# Altium PCB ECUEXT1_23.PcbDoc
Units mm, origin at the board's own origin, x right, y up, seen from the top; angles counter-clockwise.
Board outline 67.04 x 44.51 mm, 2 copper layers (Top Layer, Bottom Layer); 21 components, 27 nets, 127 pads, 6 vias.
Unrouted connection lines stored in the file: 1.
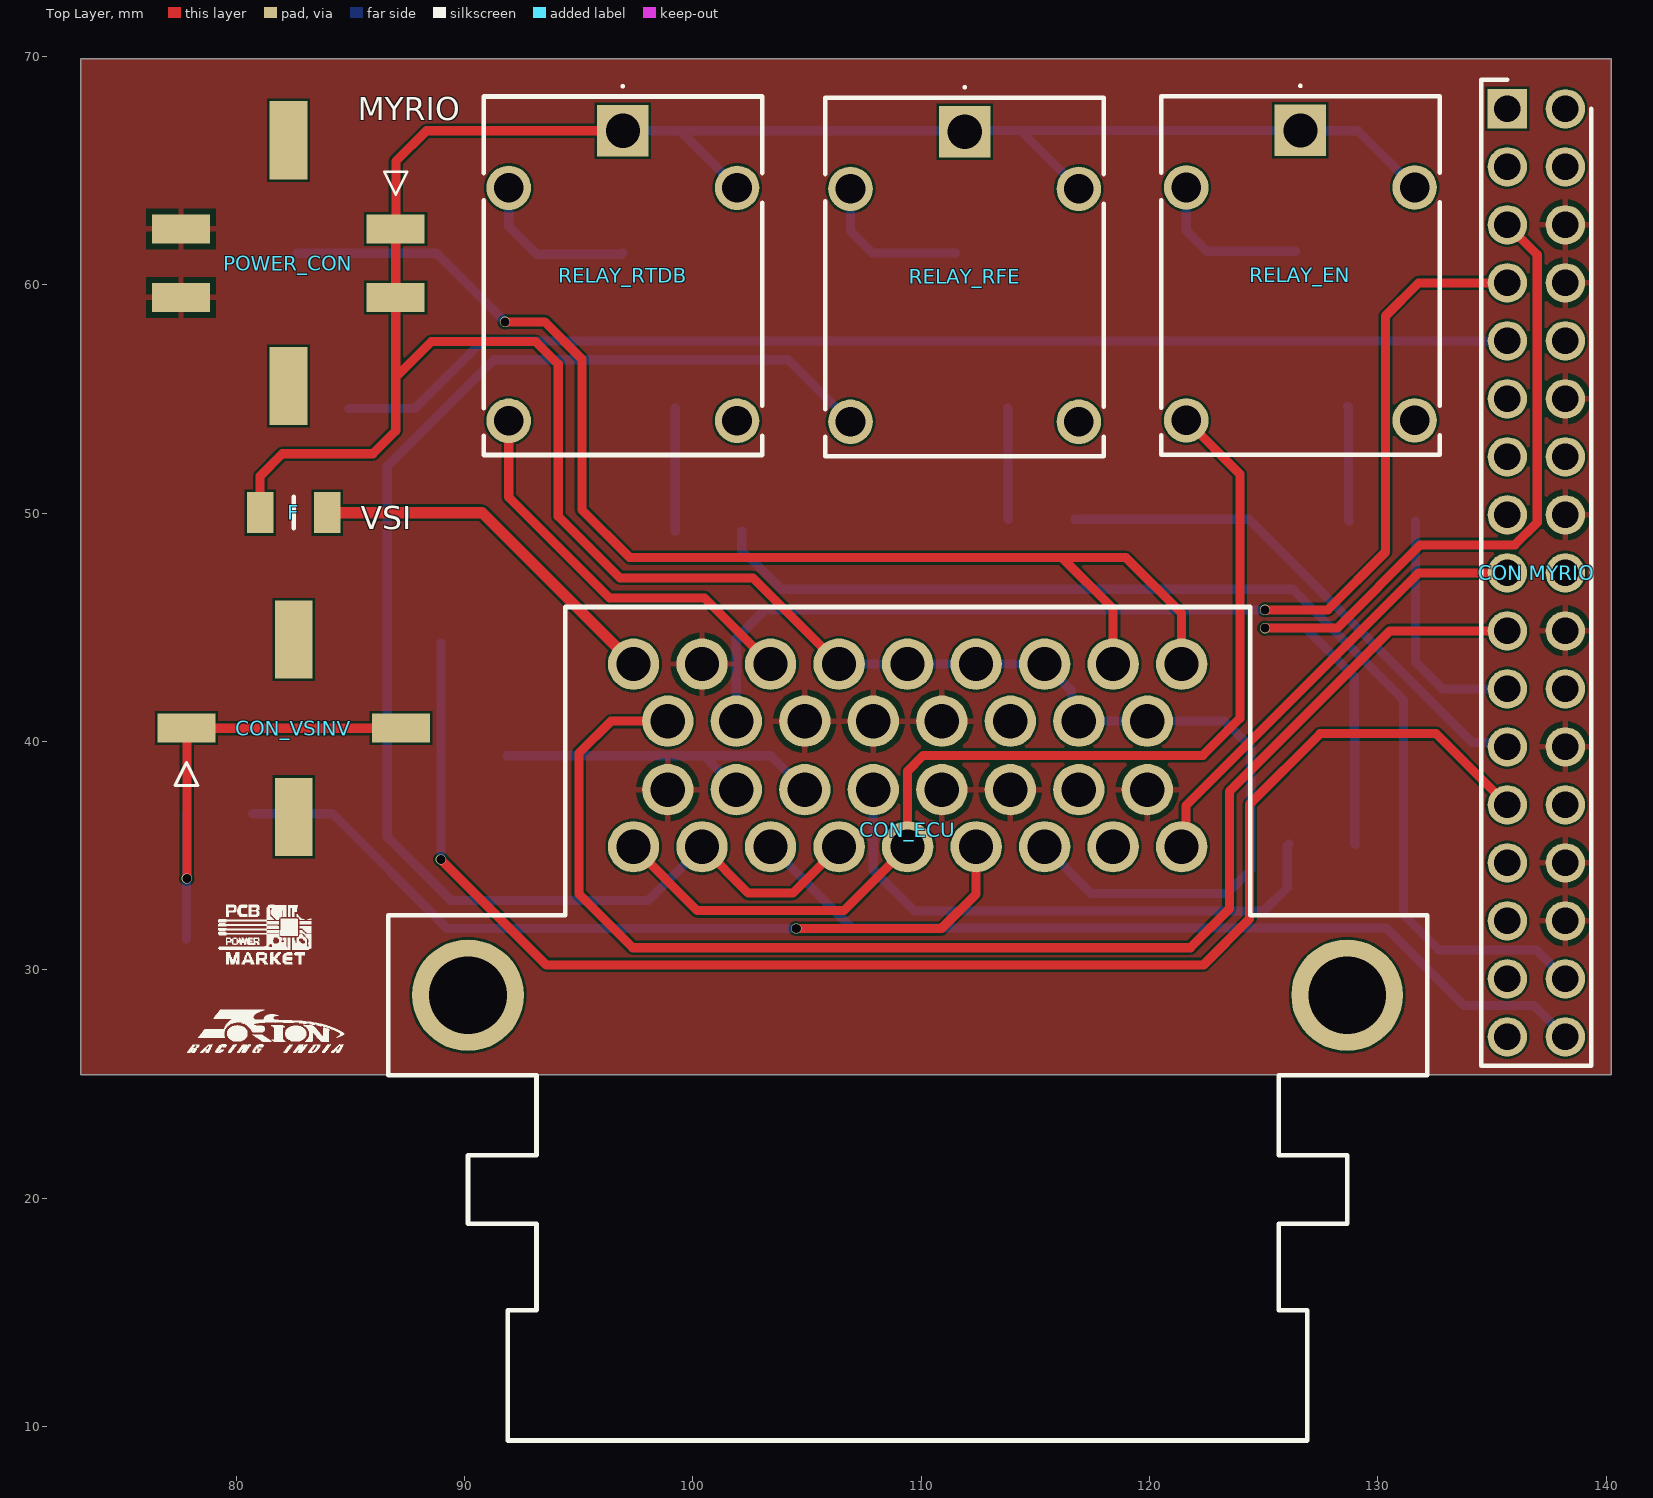
[diagram p0: Top Layer view]
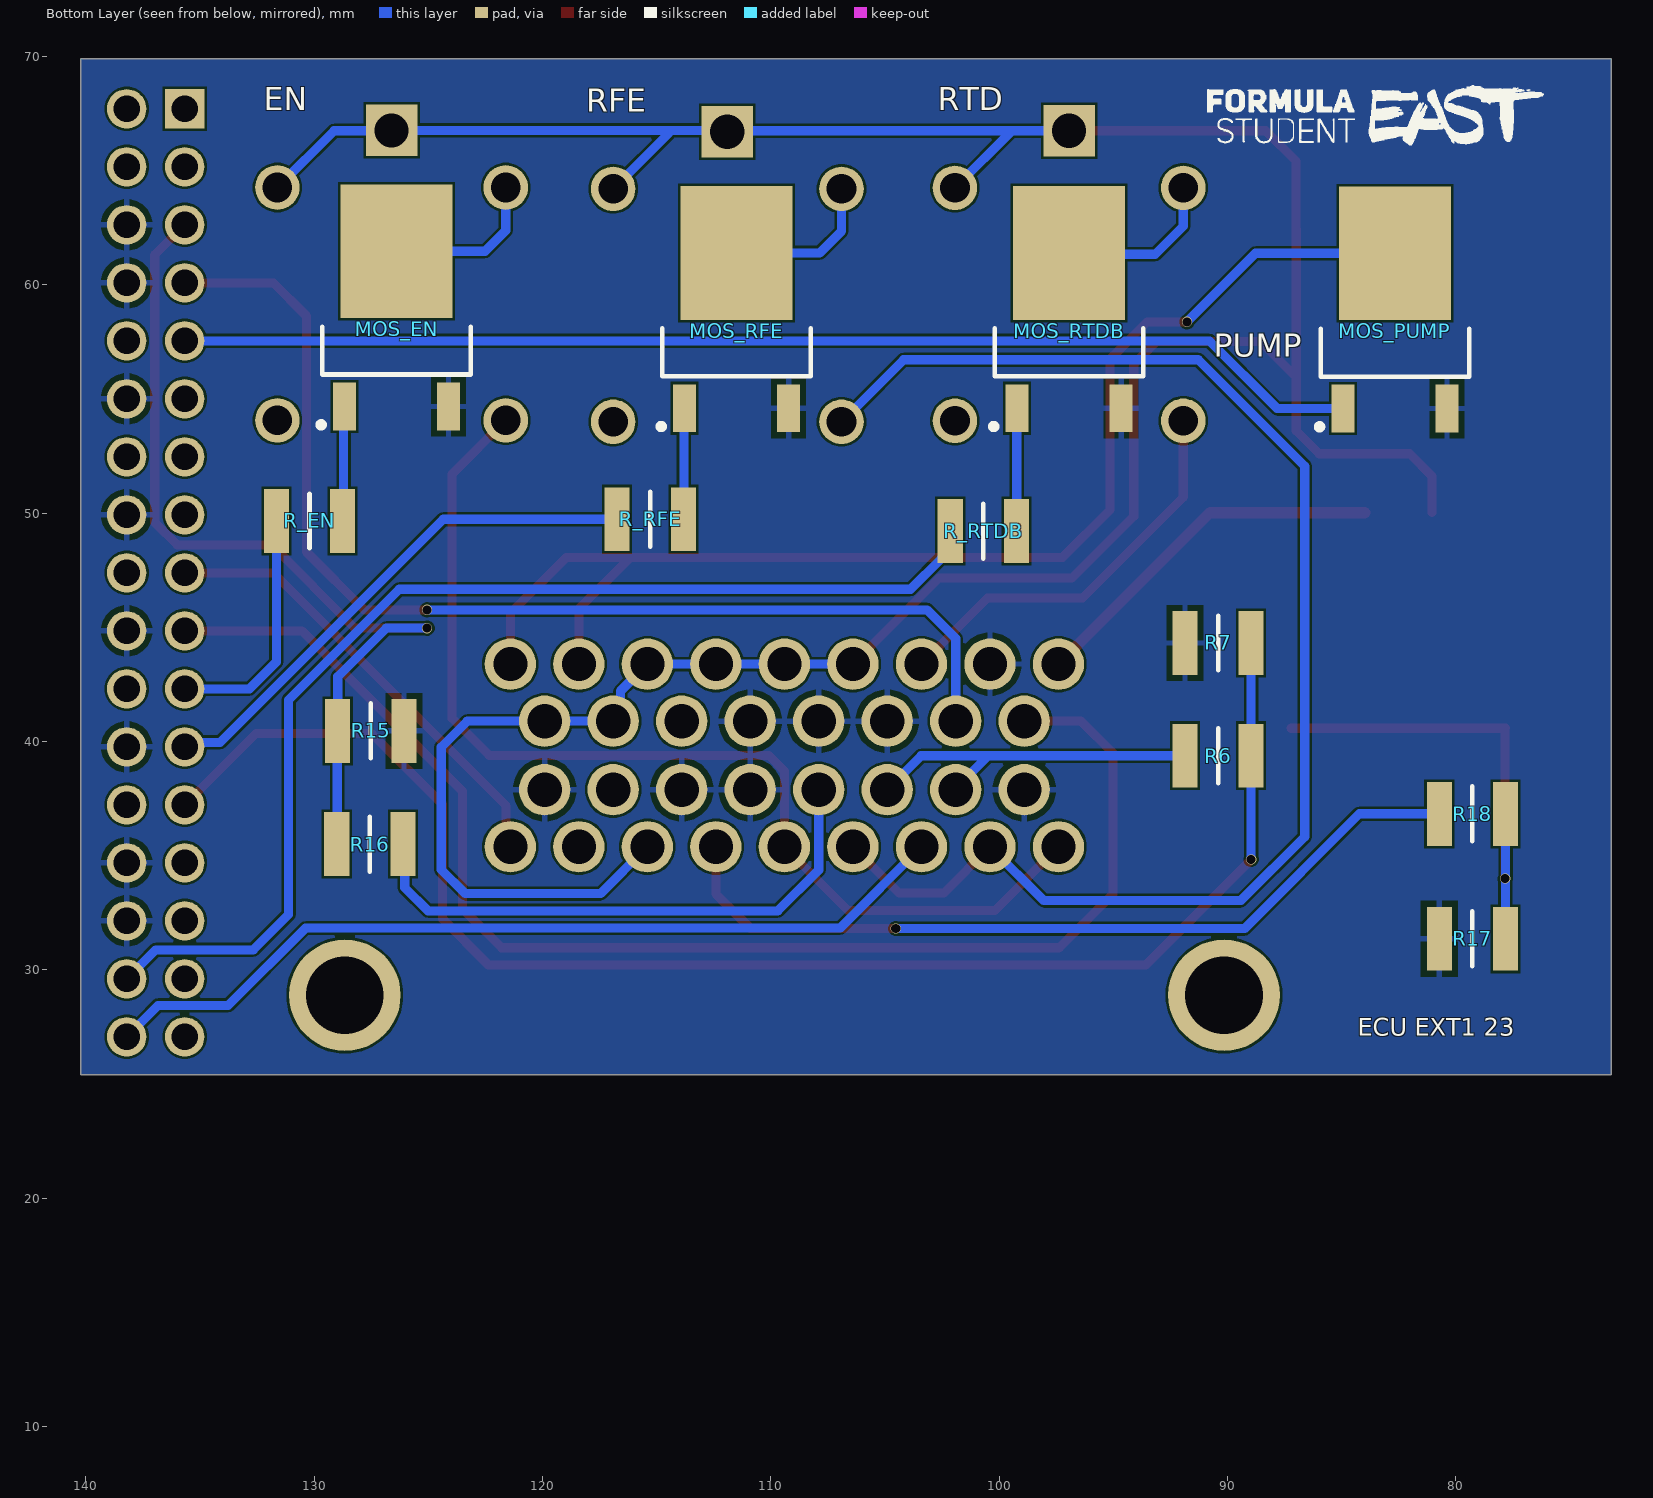
[diagram p1: Bottom Layer view, seen from below]
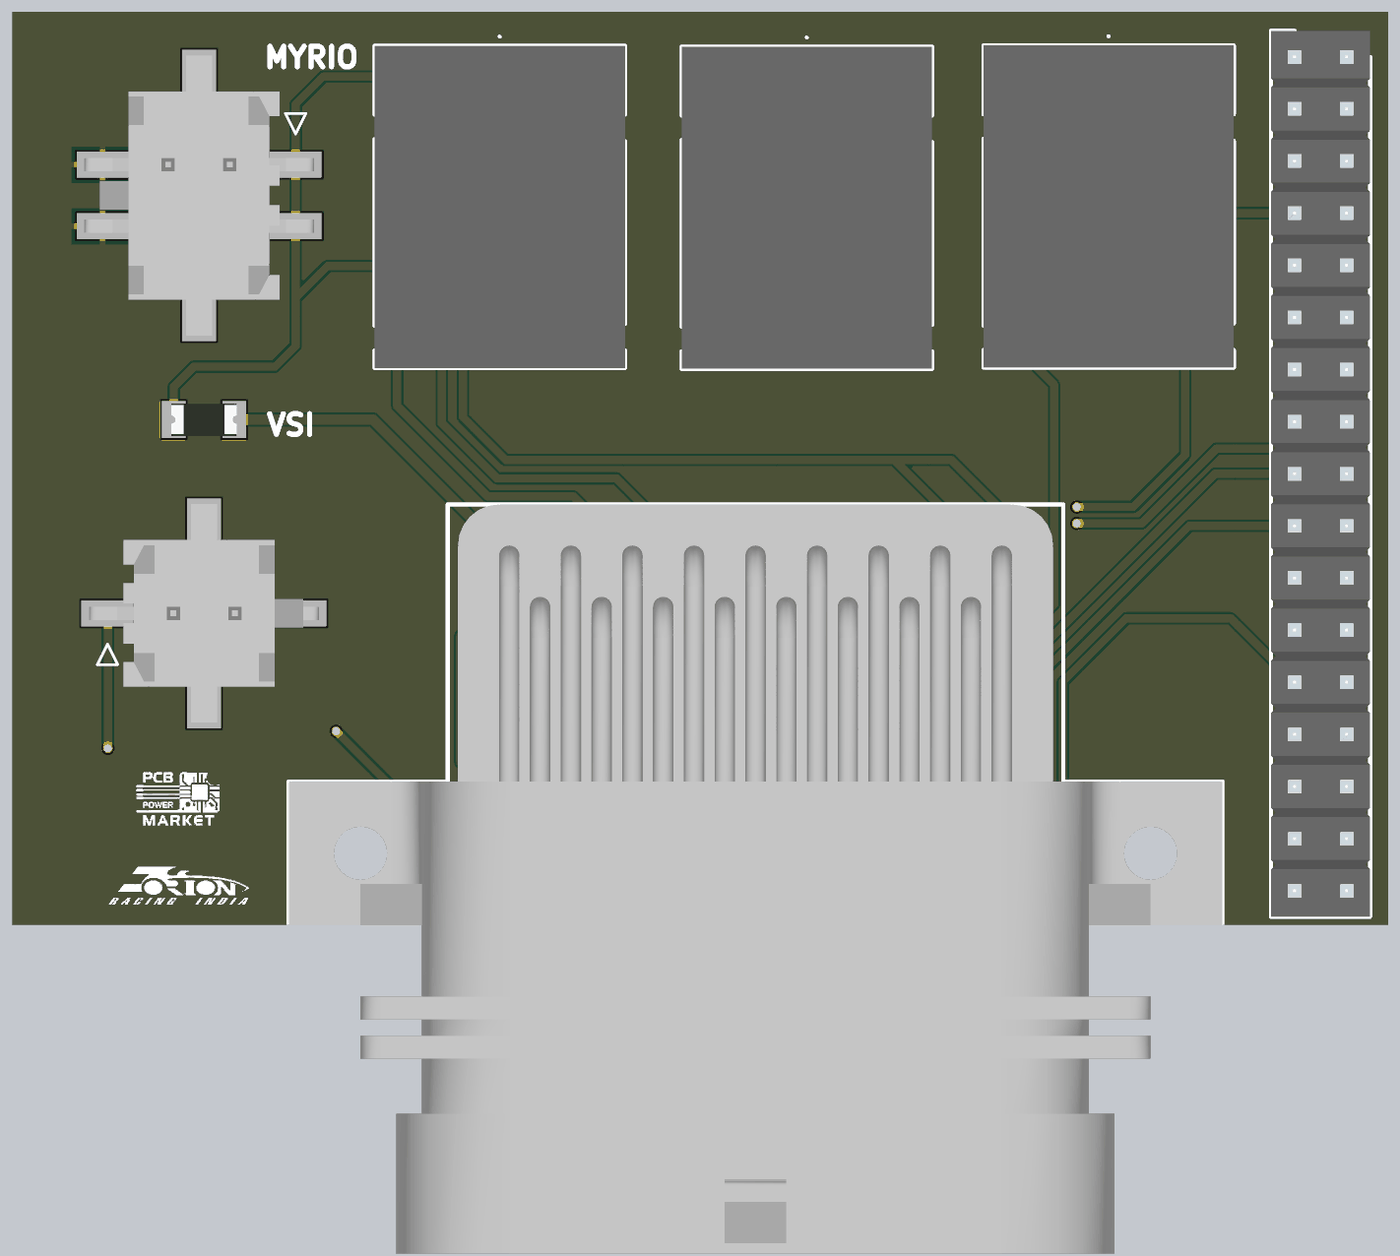
[diagram p2: 3D render of the assembled board from above, using the file's embedded part models]
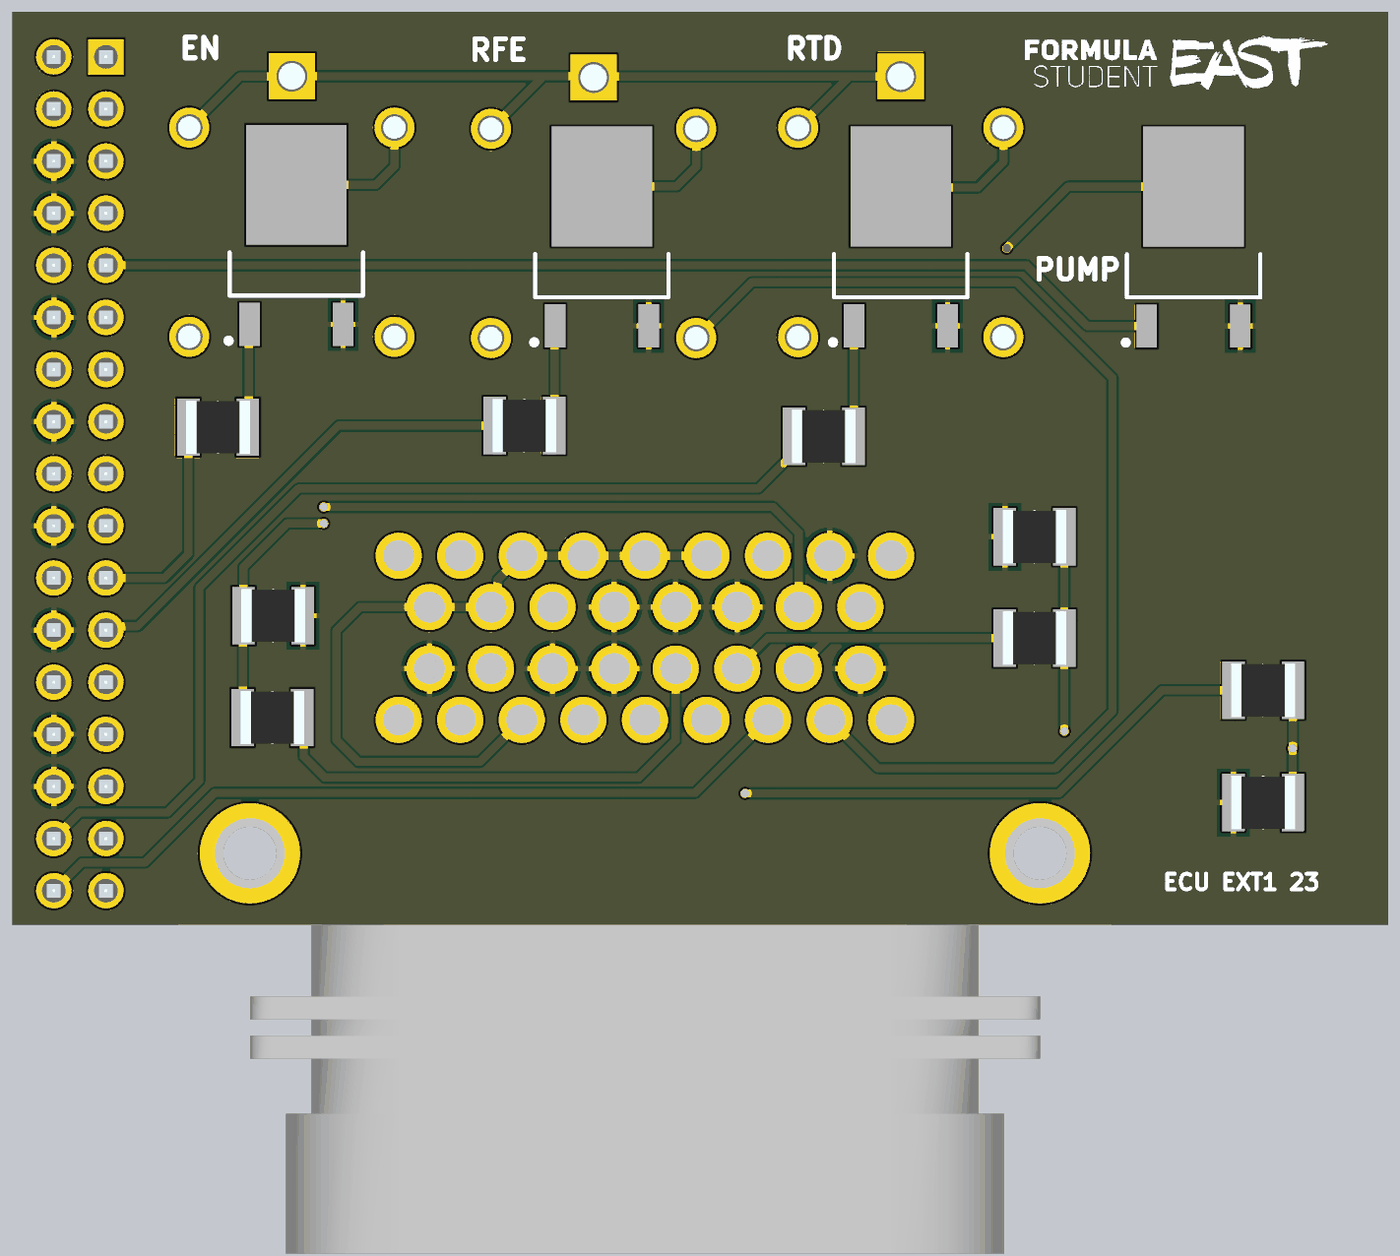
[diagram p3: 3D render of the assembled board from below, using the file's embedded part models]

## Layer stack, top to bottom
Top Solder: solder mask 0.0102, Solder Resist, Dk 3.5
Top Layer: signal copper 0.0356
Dielectric 1: dielectric 0.32, FR-4, Dk 4.8
Bottom Layer: signal copper 0.0356
Bottom Solder: solder mask 0.0102, Solder Resist, Dk 3.5

## Board outline
73.187,25.4 140.228,25.4 140.228,69.909 73.187,69.909

## Design rules (kind name [scope] priority, off if disabled: settings)
Clearance [All] p1: gap=0.1 ignorepadtopadclearanceinfootprint=FALSE
PolygonConnect [All] p1: connectstyle=Relief reliefconductorwidth=0.254 reliefentries=4 polygonreliefangle="90 Angle" airgapwidth=0.254
RoutingVias [All] p1: holewidth=0.4 width=0.45 viastyle="Through Hole" minholewidth=0.4 minwidth=0.45 maxholewidth=0.4 maxwidth=0.45
SolderMaskExpansion [All] p1: expansion=0.102 istentingtop=FALSE
Width [All] p1: maxlimit=0.5 minlimit=0.4 preferedwidth=0.4 minimp=50.000000 maximp=50.000000 favimp=50.000000
30 further rules are at their usual default settings.

## Components (designator, comment, footprint, x,y, rotation, side; value= is the part's Value field where it differs from the comment)
"CON MYRIO" "67997-234HLF" HDRV34W67P254_2X17_4318X483X858P 135.668,67.707 r270 top
CON_ECU "6437288-1" 6437288-1 109.404,45.892 r0 top
CON_VSINV "43045-0218" 43045-02YY_181920 82.524,40.583 r270 top
F "NANOSMDC020F-2" NANOSMDC016F2 82.524,50.027 r180 top
MOS_EN "STD10NF10T4" TO228P972X240-3N 126.392,59.022 r90 bottom
MOS_PUMP "STD10NF10T4" TO228P972X240-3N 82.669,58.933 r90 bottom
MOS_RFE "STD10NF10T4" TO228P972X240-3N 111.5,58.945 r90 bottom
MOS_RTDB "STD10NF10T4" TO228P972X240-3N 96.937,58.945 r90 bottom
POWER_CON "43045-0419" 43045-04YY_181920 82.289,60.953 r90 top
R6 "3.3k" RESC3126X60N 90.415,39.378 r0 bottom
R7 "2.2k" RESC3126X60N 90.415,44.317 r180 bottom
R15 "RC1210JR-0710KL" RESC3126X60N 127.518,40.47 r0 bottom
R16 "RC1210JR-0710KL" RESC3126X60N 127.557,35.504 r180 bottom
R17 "RC1210JR-0710KL" RESC3126X60N 79.275,31.363 r180 bottom
R18 "RC1210JR-0710KL" RESC3126X60N 79.275,36.835 r0 bottom
R_EN "10k" RESC3126X60N 130.202,49.659 r180 bottom
R_RFE "10k" RESC3126X60N 115.279,49.734 r180 bottom
R_RTDB "10K" RESC3126X60N 100.693,49.212 r180 bottom
RELAY_EN "SCA20-20-12VDC-C" SCA202012VDCC 126.608,66.763 r90 top
RELAY_RFE "SCA20-20-12VDC-C" SCA202012VDCC 111.904,66.702 r90 top
RELAY_RTDB "SCA20-20-12VDC-C" SCA202012VDCC 96.937,66.747 r90 top

## Footprints (in the part's own frame and the unit in brackets; to place one, negate y for a bottom-side part, rotate by r counter-clockwise, add the part's x,y. Pads: shape width x height; smd on the part's side, far side on the other; paste and mask are expansions set on the pad)
43045-02YY_181920 [mm]
  rect 1.27x2.54 smd: 1(0,-4.7) 2(0,4.7)
  rect 3.43x1.65 smd: 3(3.885,0) 4(-3.885,0)
  silkscreen extent 1.5,-5.2 2.5,-4.2, body extent -5.33,-5.6 5.33,5.6, height 9.96
43045-04YY_181920 [mm]
  rect 1.27x2.54 smd: 1(1.5,-4.7) 2(-1.5,-4.7) 3(1.5,4.7) 4(-1.5,4.7)
  rect 3.43x1.65 smd: 5(5.385,0) 6(-5.385,0)
  silkscreen extent 3,-5.2 4,-4.2, body extent -6.83,-5.6 6.83,5.6, height 9.96
6437288-1 [mm]
  round 2.25 hole 1.5: 1(-12,-2.5) 2(-9,-2.5) 3(-6,-2.5) 4(-3,-2.5) 5(0,-2.5) 6(3,-2.5) 7(6,-2.5) 8(9,-2.5) 9(12,-2.5) 10(-10.5,-5) 11(-7.5,-5) 12(-4.5,-5) 13(-1.5,-5) 14(1.5,-5) 15(4.5,-5) 16(7.5,-5) 17(10.5,-5) 18(-10.5,-8) 19(-7.5,-8) 20(-4.5,-8) 21(-1.5,-8) 22(1.5,-8) 23(4.5,-8) 24(7.5,-8) 25(10.5,-8) 26(-12,-10.5) 27(-9,-10.5) 28(-6,-10.5) 29(-3,-10.5) 30(0,-10.5) 31(3,-10.5) 32(6,-10.5) 33(9,-10.5) 34(12,-10.5)
  round 4.89 hole 3.4: 35(19.25,-17) 36(-19.25,-17)
  silkscreen extent -22.75,-36.5 22.75,0, body extent -22.75,-36.5 22.75,0, height 28.16
HDRV34W67P254_2X17_4318X483X858P [mm]
  rect 1.725x1.725 hole 1.15: 1(0,0)
  round 1.725 hole 1.15: 2(0,2.54) 3(2.54,0) 4(2.54,2.54) 5(5.08,0) 6(5.08,2.54) 7(7.62,0) 8(7.62,2.54) 9(10.16,0) 10(10.16,2.54) 11(12.7,0) 12(12.7,2.54) 13(15.24,0) 14(15.24,2.54) 15(17.78,0) 16(17.78,2.54) 17(20.32,0) 18(20.32,2.54) 19(22.86,0) 20(22.86,2.54) 21(25.4,0) 22(25.4,2.54) 23(27.94,0) 24(27.94,2.54) 25(30.48,0) 26(30.48,2.54) 27(33.02,0) 28(33.02,2.54) 29(35.56,0) 30(35.56,2.54) 31(38.1,0) 32(38.1,2.54) 33(40.64,0) 34(40.64,2.54)
  silkscreen extent -1.27,-1.14 41.91,3.69, body extent -1.27,-1.14 41.91,3.68, height 8.58
NANOSMDC016F2 [mm]
  rect 1.16x1.81 smd: 1(-1.475,0) 2(1.475,0)
  silkscreen extent 0,-0.69 0,0.69, body extent -1.6,-0.79 1.6,0.79, height 0.82
RESC3126X60N [mm]
  rect 1.1x2.8 smd: 1(-1.45,0) 2(1.45,0)
  silkscreen extent 0,-1.2 0,1.2, body extent -1.55,-1.3 1.55,1.3, height 0.6
SCA202012VDCC [mm]
  rect 2.25x2.25 hole 1.5: 1(0,0)
  round 1.95 hole 1.3: 2(-2.5,5) 3(-12.7,5) 4(-12.7,-5) 5(-2.5,-5)
  silkscreen extent -14.2,-6.1 2,6.1, body extent -14.2,-6.1 1.5,6.1, height 13.8
TO228P972X240-3N [mm]
  rect 2.1x1 smd: 1(-4.35,2.28) 3(-4.35,-2.28)
  rect 5.85x4.9 smd: 4(2.45,0)
  silkscreen extent -5.27,-3.25 -0.85,3.43

## Part data
"CON MYRIO": "Connector", Manufacturer_Name=Amphenol, Mouser Part Number=649-67997-234HLF, Arrow Part Number=67997-234HLF, Arrow Price/Stock=https://www.arrow.com/en/products/67997-234hlf/amphenol-fci?region=nac, Datasheet Link=https://cdn.amphenol-icc.com/media/wysiwyg/files/drawing/67996.pdf, Height=8.58mm, Manufacturer_Part_Number=67997-234HLF, Mouser Price/Stock=https://www.mouser.co.uk/ProductDetail/Amphenol-FCI/67997-234HLF?qs=zh4O8xspOuxBU73L6U2QCQ%3D%3D
CON_ECU: "Connector", Manufacturer_Name="TE Connectivity", Mouser Part Number=571-6437288-1, Arrow Part Number=6437288-1, Arrow Price/Stock=https://www.arrow.com/en/products/6437288-1/te-connectivity, Datasheet Link=http://www.te.com/commerce/DocumentDelivery/DDEController?Action=srchrtrv&DocNm=6437288-1&DocType=Customer+Drawing&DocLang=Japanese, Manufacturer_Part_Number=6437288-1, Mouser Price/Stock=https://www.mouser.co.uk/ProductDetail/TE-Connectivity/6437288-1?qs=WBj8811fzwGYtKR8aBSJZw%3D%3D
CON_VSINV: "Connector", Manufacturer_Name=Molex, Mouser Part Number=538-43045-0218, Arrow Part Number=43045-0218, Arrow Price/Stock=https://www.arrow.com/en/products/43045-0218/molex, Datasheet Link=https://www.molex.com/pdm_docs/sd/430450218_sd.pdf, Height=9.91mm, Manufacturer_Part_Number=43045-0218, Mouser Price/Stock=https://www.mouser.co.uk/ProductDetail/Molex/43045-0218?qs=4XSMV6Twtb2qUKINalLbdA%3D%3D
F: "Resettable Fuse", Manufacturer_Name=LITTELFUSE, Mouser Part Number=650-NANOSMDC020F-2, Arrow Part Number=NANOSMDC020F-2, Arrow Price/Stock=https://www.arrow.com/en/products/nanosmdc020f-2/littelfuse, Datasheet Link=https://www.littelfuse.com/~/media/electronics/datasheets/resettable_ptcs/littelfuse_ptc_nanosmdc_datasheet.pdf.pdf, Height=1mm, Manufacturer_Part_Number=NANOSMDC020F-2, Mouser Price/Stock=https://www.mouser.co.uk/ProductDetail/Littelfuse/NANOSMDC020F-2?qs=iK0evp%252BCRRU6agwMt7HYjg%3D%3D
MOS_EN MOS_PUMP MOS_RFE MOS_RTDB: "Integrated Circuit", Manufacturer_Name=STMicroelectronics, Mouser Part Number=511-STD10NF10, Arrow Part Number=STD10NF10T4, Arrow Price/Stock=https://www.arrow.com/en/products/std10nf10t4/stmicroelectronics, Datasheet Link=https://datasheet.datasheetarchive.com/originals/distributors/SFDatasheet-5/sf-000113456.pdf, Height=2.4mm, Manufacturer_Part_Number=STD10NF10T4, Mouser Price/Stock=https://www.mouser.co.uk/ProductDetail/STMicroelectronics/STD10NF10T4?qs=El1T93pd01%2FBh%252BX9NfIsIQ%3D%3D
POWER_CON: "Connector", Manufacturer_Name=Molex, Mouser Part Number=538-43045-0419, Datasheet Link=https://www.molex.com/pdm_docs/sd/430450218_sd.pdf, Height=9.91mm, Manufacturer_Part_Number=43045-0419, Mouser Price/Stock=https://www.mouser.co.uk/ProductDetail/Molex/43045-0419?qs=UeCeOHRHQebVNIQyI9VWWg%3D%3D
R6 R7 R_EN R_RFE: library part RC1210JR-0710KL, "Resistor", Manufacturer_Name="YAGEO (PHYCOMP)", Mouser Part Number=603-RC1210JR-0710KL, Arrow Part Number=RC1210JR-0710KL, Arrow Price/Stock=https://www.arrow.com/en/products/rc1210jr-0710kl/yageo, Datasheet Link=https://datasheet.datasheetarchive.com/originals/distributors/Datasheets_SAMA/902f9e387b938f871d31120f5fc1d65e.pdf, Height=0.6mm, Manufacturer_Part_Number=RC1210JR-0710KL, Mouser Price/Stock=https://www.mouser.co.uk/ProductDetail/YAGEO/RC1210JR-0710KL?qs=6sj9KdP9svgfoubno5Jb%252BA%3D%3D
R15 R16 R17 R18: "Resistor", Manufacturer_Name="YAGEO (PHYCOMP)", Mouser Part Number=603-RC1210JR-0710KL, Arrow Part Number=RC1210JR-0710KL, Arrow Price/Stock=https://www.arrow.com/en/products/rc1210jr-0710kl/yageo, Datasheet Link=https://datasheet.datasheetarchive.com/originals/distributors/Datasheets_SAMA/902f9e387b938f871d31120f5fc1d65e.pdf, Height=0.6mm, Manufacturer_Part_Number=RC1210JR-0710KL, Mouser Price/Stock=https://www.mouser.co.uk/ProductDetail/YAGEO/RC1210JR-0710KL?qs=6sj9KdP9svgfoubno5Jb%252BA%3D%3D
R_RTDB: library part RC1210JR-0710KL, "Resistor", Manufacturer_Name=KEMET, Mouser Part Number=603-RC1210JR-0710KL, Arrow Part Number=RC1210JR-0710KL, Arrow Price/Stock=https://www.arrow.com/en/products/rc1210jr-0710kl/yageo, Datasheet Link=https://datasheet.datasheetarchive.com/originals/distributors/Datasheets_SAMA/902f9e387b938f871d31120f5fc1d65e.pdf, Height=0.6mm, Manufacturer_Part_Number=RC1210JR-0710KL, Mouser Price/Stock=https://www.mouser.co.uk/ProductDetail/YAGEO/RC1210JR-0710KL?qs=6sj9KdP9svgfoubno5Jb%252BA%3D%3D
RELAY_EN RELAY_RFE RELAY_RTDB: "Relay or Contactor", Manufacturer_Name=LEONE, Datasheet Link=https://www.kuraelectronics.com/new-pdf/SCA%2020.pdf, Height=13.7mm, Manufacturer_Part_Number=SCA20-20-12VDC-C

## Via types
v1: diameter 0.45, hole 0.4, Top Layer to Bottom Layer, 6 vias

## Nets (pads, with @x,y where several pads share a name; then routed paths per layer and width w, separated by ;. In a path a pad name is that pad's centre, name@x,y a point inside that pad or via, vN(x,y) a via of type N, cw(c..) or ccw(c..) an arc to the next point about the centre after c; other vN are vias at no path point)
+12: CON_ECU.4 CON_ECU.5 CON_ECU.6 CON_ECU.7 CON_ECU.16 CON_ECU.17 CON_ECU.32 F.2 POWER_CON.1 POWER_CON.2 RELAY_EN.1 RELAY_EN.5 RELAY_RFE.1 RELAY_RFE.5 RELAY_RTDB.1 RELAY_RTDB.5 | length 139
  Top Layer w0.4: F.2 81.049,51.628 82.026,52.605 85.987,52.605 86.989,53.607 86.989,55.954 ; POWER_CON.1 POWER_CON.2 86.989,55.954 ; POWER_CON.1@86.995,62.453 86.995,65.407 88.335,66.747 RELAY_RTDB.1 ; CON_ECU.4 102.629,47.166 96.803,47.166 94.108,49.861 94.108,56.528 93.121,57.515 88.55,57.515 86.989,55.954
  Bottom Layer w0.4: RELAY_RTDB.1 99.437,66.747 ; RELAY_RTDB.5 99.437,66.747 ; CON_ECU.4 CON_ECU.5 CON_ECU.6 CON_ECU.7 116.584,42.211 116.584,41.211 CON_ECU.16 CON_ECU.17 123.294,40.892 124.43,39.756 124.43,34.39 123.384,33.344 117.451,33.344 CON_ECU.32 ; RELAY_RFE.1@111.904,66.747 99.437,66.747 ; RELAY_RFE.1@111.965,66.763 114.487,66.763 ; RELAY_RFE.5 114.487,66.62 114.487,66.763 ; RELAY_EN.1@126.608,66.747 129.124,66.747 RELAY_EN.5 ; RELAY_EN.1 114.487,66.763
AI3/BAMOCAR: "CON MYRIO.25" R6.1 R7.2 | length 66.5
  Top Layer w0.4: v1(88.965,34.836) 93.586,30.215 122.363,30.215 124.379,32.231 124.379,37.256 127.469,40.346 132.55,40.346 135.668,37.227
  Bottom Layer w0.4: v1(88.965,34.836) R6.1 R7.2
AO0/APPS: "CON MYRIO.34" CON_ECU.28 | length 38.3
  Bottom Layer w0.4: CON_ECU.28 106.961,31.834 130.375,31.834 133.764,28.445 136.831,28.445 138.208,27.067
AO1/RTD_BUZZER: "CON MYRIO.32" R_RTDB.1 | length 50.2
  Bottom Layer w0.4: R_RTDB.1 102.143,48.362 102.493,48.012 102.54,48.012 103.883,46.669 126.272,46.669 131.115,41.826 131.115,32.431 132.668,30.878 136.938,30.878 138.208,29.607
BUZZER: CON_ECU.3 RELAY_RTDB.3 | length 17.8
  Top Layer w0.4: RELAY_RTDB.3 91.937,50.7 96.348,46.289 100.506,46.289 CON_ECU.3
DIO0/RFE: "CON MYRIO.23" R_RFE.1 | length 23.1
  Bottom Layer w0.4: R_RFE.1 124.344,49.734 134.117,39.961 135.475,39.961 135.668,39.767
DIO1/EN: "CON MYRIO.21" R_EN.1 | length 10.7
  Bottom Layer w0.4: R_EN.1 131.652,43.484 132.829,42.307 135.668,42.307
DIO2/RTD_BUTTON: "CON MYRIO.19" CON_ECU.10 | length 61
  Top Layer w0.4: CON_ECU.10 96.417,40.892 95.009,39.484 95.009,33.329 97.371,30.967 121.788,30.967 123.501,32.68 123.501,37.817 130.531,44.847 135.668,44.847
DIO3/RTD_BRAKE: "CON MYRIO.17" CON_ECU.33 CON_ECU.34 | length 20.2
  Top Layer w0.4: CON_ECU.34 121.591,35.579 121.591,37.188 131.79,47.387 135.668,47.387
DIO8/PUMP_OUT: "CON MYRIO.9" MOS_PUMP.1 | length 51.9
  Bottom Layer w0.4: MOS_PUMP.1 87.83,54.583 90.794,57.547 135.668,57.547
DIO9/PUMP_CONTROL: "CON MYRIO.7" CON_ECU.11 | length 49.9
  Top Layer w0.4: v1(125.056,45.768) 127.802,45.768 130.333,48.299 130.333,58.637 131.783,60.087 135.668,60.087
  Bottom Layer w0.4: CON_ECU.11 101.904,44.512 103.16,45.768 v1(125.056,45.768)
EN: CON_ECU.26 CON_ECU.30 RELAY_EN.3 | length 47.2
  Top Layer w0.4: CON_ECU.26 100.2,32.595 106.607,32.595 CON_ECU.30 109.404,38.712 110.088,39.396 122.338,39.396 123.954,41.012 123.954,51.717 RELAY_EN.3
GND: "CON MYRIO.6" "CON MYRIO.8" "CON MYRIO.12" "CON MYRIO.16" "CON MYRIO.20" "CON MYRIO.24" "CON MYRIO.28" "CON MYRIO.30" CON_ECU.2 CON_ECU.12 CON_ECU.13 CON_ECU.14 CON_ECU.18 CON_ECU.22 CON_ECU.23 CON_ECU.25 MOS_EN.3 MOS_PUMP.3 MOS_RFE.3 MOS_RTDB.3 POWER_CON.3 POWER_CON.4 R7.1 R15.1 R17.1
NetMOS_EN_1: MOS_EN.1 R_EN.2 | length 5
  Bottom Layer w0.4: MOS_EN.1 MOS_EN.1 128.712,54.629 128.712,49.699 R_EN.2
NetMOS_EN_4: MOS_EN.4 RELAY_EN.2 | length 7
  Bottom Layer w0.4: RELAY_EN.2 121.608,62.381 122.517,61.472 MOS_EN.4
NetMOS_RFE_1: MOS_RFE.1 R_RFE.2 | length 4.9
  Bottom Layer w0.4: MOS_RFE.1 113.804,54.57 113.804,49.759 R_RFE.2
NetMOS_RFE_4: MOS_RFE.4 RELAY_RFE.2 | length 6.8
  Bottom Layer w0.4: RELAY_RFE.2 106.904,62.351 107.86,61.395 MOS_RFE.4
NetMOS_RTDB_1: MOS_RTDB.1 R_RTDB.2 | length 5.4
  Bottom Layer w0.4: MOS_RTDB.1 99.23,54.582 99.23,49.225 R_RTDB.2
NetMOS_RTDB_4: MOS_RTDB.4 RELAY_RTDB.2 | length 7.2
  Bottom Layer w0.4: RELAY_RTDB.2 91.937,62.573 93.169,61.341 96.884,61.341 MOS_RTDB.4
PUMP: CON_ECU.8 CON_ECU.9 MOS_PUMP.4 | length 57
  Top Layer w0.4: v1(91.776,58.38) 93.516,58.38 95.142,56.754 95.142,50.149 97.234,48.057 116.155,48.057 ; CON_ECU.8 118.404,45.808 116.155,48.057 ; CON_ECU.9 121.404,45.612 118.959,48.057 116.155,48.057
  Bottom Layer w0.4: MOS_PUMP.4 88.773,61.383 v1(91.776,58.38)
PUMP_BAMOCAR: CON_ECU.19 CON_ECU.20 R6.2 | length 15.7
  Bottom Layer w0.4: R6.2 100.47,39.378 ; CON_ECU.19 101.904,37.944 100.47,39.378 ; CON_ECU.20 103.417,39.378 100.47,39.378
RFE: CON_ECU.27 CON_ECU.29 RELAY_RFE.3 | length 63.2
  Top Layer w0.4: CON_ECU.27 102.433,33.362 104.374,33.362 CON_ECU.29
  Bottom Layer w0.4: CON_ECU.27 98.049,33.037 89.412,33.037 86.619,35.83 86.619,52.057 91.279,56.717 104.186,56.717 RELAY_RFE.3@106.901,54.002
SPARE: CON_ECU.21 R16.2 | length 24.7
  Bottom Layer w0.4: CON_ECU.21 107.904,34.374 109.696,32.582 125.011,32.582 126.031,33.602 126.031,35.428 R16.2
SPARE5V: "CON MYRIO.5" R15.2 R16.1 | length 39.6
  Top Layer w0.4: v1(125.053,44.966) 128.212,44.966 131.858,48.612 135.997,48.612 136.977,49.592 136.977,61.319 135.668,62.627
  Bottom Layer w0.4: v1(125.053,44.966) 126.842,44.966 128.968,42.84 R15.2 128.987,40.451 128.987,35.523 R16.1
SUPPLY: CON_ECU.1 F.1 | length 16.2
  Top Layer w0.5: F.1 90.768,50.027 CON_ECU.1
VS_INV_CONNECTOR: CON_ECU.31 R18.2 | length 36.5
  Top Layer w0.4: v1(104.526,31.81) 110.889,31.81 112.404,33.325 CON_ECU.31
  Bottom Layer w0.4: R18.2 84.223,36.835 89.248,31.81 v1(104.526,31.81)
VS_INV_IN: CON_VSINV.1 CON_VSINV.2 R17.2 R18.1 | length 21.5
  Top Layer w0.4: v1(77.843,34) 77.843,40.564 CON_VSINV.1 CON_VSINV.2
  Bottom Layer w0.4: R17.2 77.834,31.372 77.834,33.991 v1(77.843,34) 77.843,34.014 77.825,34.032 R18.1
pads on no net: "CON MYRIO.1" "CON MYRIO.2" "CON MYRIO.3" "CON MYRIO.4" "CON MYRIO.10" "CON MYRIO.11" "CON MYRIO.13" "CON MYRIO.14" "CON MYRIO.15" "CON MYRIO.18" "CON MYRIO.22" "CON MYRIO.26" "CON MYRIO.27" "CON MYRIO.29" "CON MYRIO.31" "CON MYRIO.33" CON_ECU.15 CON_ECU.24 CON_ECU.35 CON_ECU.36 CON_VSINV.3 CON_VSINV.4 POWER_CON.5 POWER_CON.6 RELAY_EN.4 RELAY_RFE.4 RELAY_RTDB.4

## Polygon pours and split planes (outlines as drawn)
GND on Bottom Layer "GND_L02_P000" (solid, remove dead copper, pour order 0): 73.187,69.909 140.228,69.909 140.228,25.4 73.187,25.4
GND on Top Layer "GND_L01_P001" (solid, remove dead copper, pour order 1): 73.187,25.4 140.228,25.4 140.228,69.909 73.187,69.909

## Silkscreen, mask and mechanical layers (free items; w line width, h text height)
Top Overlay:
  drawing of 48 lines, arcs and shapes, not listed
  text "MYRIO" at 85.335,67.212 h1
  text "VSI" at 85.459,49.3 h1
Bottom Overlay:
  drawing of 17 lines, arcs and shapes, not listed
  text "RTD" at 102.7,67.638 h1
  text "EN" at 132.209,67.651 h1
  text "RFE" at 118.085,67.573 h1
  text "PUMP" at 90.603,56.86 h1
  text "ECU EXT1 23" at 84.296,27.12 h0.76